# EAGLE board ups_unit (EAGLE 9.5.2)

Size 60.96 x 20.31 mm. Coordinates in mm from the lower left corner, seen from the top.
Outline: 0,0 60.96,0 60.96,20.31 0,20.31 0,0
Copper layers (1*16): Top 0.035mm / dielectric 1.5mm / Bottom 0.035mm
Design rules "default": minimum track width 6mil, minimum drill 0.35mm, track to track 6mil, track to pad 6mil, pad to pad 6mil, via to via 6mil, smd to smd 6mil, copper to edge 40mil, drill to drill 6mil, minimum pad ring 10mil, minimum via ring 8mil, stop-mask expansion 4mil, vias tented up to drill 0mil, thermal gap 10mil
Holes 3 mm at 3.81,10.16 57.15,10.16

## Footprints (pad centres in the part's own frame; a part is rotated, then mirrored left to right if it is on the bottom)
C1206 = smd 1.6 x 1.8: 1 -1.4,0; 2 1.4,0
R1206 = smd 1.6 x 1.803: 1 -1.422,0; 2 1.422,0
C0603 = smd 1.1 x 1: 1 -0.85,0; 2 0.85,0
SOT23 = smd 1 x 1.4: 1 -0.95,-1.1; 2 0.95,-1.1; 3 0,1.1
C2012 = smd 1.3 x 1.5: 1 -0.85,0; 2 0.85,0
C0805 = smd 1.3 x 1.5: 1 -0.95,0; 2 0.95,0
DO35-10 = drill 0.813 long: A 5.08,0; C -5.08,0
SMA-DO214AC = smd 1.8 x 1.7: A -2.05,0; K 2.05,0
1X02 = drill 1.016 long: 1 -1.27,0; 2 1.27,0
TACTILE_SWITCH_SMD_RIGHT_ANGLE = smd 1.1 x 2: 1 -1.95,0; 2 1.95,0 | hole 0.7: 0,0.9; 0,-0.9

## Placement (x,y rotation side)
0.1UF4  [C1206]  29.21,17.78 0 bottom
0.1UF5  [C1206]  29.21,12.7 0 bottom
1.8K1  [R1206]  16.51,6.35 0 bottom
1M1  [R1206]  16.51,10.16 0 bottom
1UF1  [C0603]  10.16,10.16 0 bottom
1UF2  [C0603]  10.16,6.35 0 bottom
2N7002K1  BCX70SMD  [SOT23]  55.88,20.32 0 bottom
2N7002K2  BCX70SMD  [SOT23]  55.88,12.7 0 bottom
3.3K1  [R1206]  16.51,2.54 0 bottom
4.7UF2  [C2012]  10.16,13.97 0 bottom
5.6K1  [R1206]  10.16,17.78 0 bottom
5.6K2  [R1206]  77.47,27.94 0 bottom  (outside the outline)
10K3  [R1206]  29.21,7.62 0 bottom
10K4  [R1206]  29.21,2.54 0 bottom
10K5  [R1206]  22.86,17.78 0 bottom
10K6  [R1206]  22.86,13.97 0 bottom
22UF1  [C0805]  10.16,2.54 0 bottom
100K1  [R1206]  22.86,10.16 0 bottom
100K2  [R1206]  22.86,6.35 0 bottom
100K3  [R1206]  22.86,2.54 0 bottom
100K4  [R1206]  16.51,17.78 0 bottom
100K5  [R1206]  16.51,13.97 0 bottom
D1  1N4148DO35-10  [DO35-10]  43.18,35.56 0 bottom  (outside the outline)
D2  1N4148DO35-10  [DO35-10]  43.18,29.21 0 bottom  (outside the outline)
D3  1N4148DO35-10  [DO35-10]  43.18,22.86 0 bottom
D4  1N4148DO35-10  [DO35-10]  43.18,16.51 0 bottom
D5  1N4148DO35-10  [DO35-10]  43.18,10.16 0 bottom
D6  1N4148DO35-10  [DO35-10]  43.18,3.81 0 bottom
D9  GF1  [SMA-DO214AC]  67.31,8.89 90 bottom  (outside the outline)
DMG3415U1  MMBTA56-SOT23  [SOT23]  55.88,27.94 0 bottom  (outside the outline)
DMG3415U2  MMBTA56-SOT23  [SOT23]  55.88,35.56 0 bottom  (outside the outline)
JP1  [1X02]  57.15,5.08 270 top
JP2  [1X02]  57.15,15.24 270 top
JP3  [1X02]  3.81,15.24 90 top
JP4  [1X02]  3.81,5.08 90 top
S1  MOMENTARY-SWITCH-SPST-SMD-RIGHT-ANGLE  [TACTILE_SWITCH_SMD_RIGHT_ANGLE]  71.12,30.48 0 bottom  (outside the outline)

## Library data of the parts
0.1UF4 0.1UF5 1UF1 1UF2 4.7UF2 22UF1 = eagle-ltspice; SPICEMODEL: NONE; SPICEPREFIX: C
1.8K1 1M1 3.3K1 5.6K1 5.6K2 10K3-10K6 100K1-100K5 = eagle-ltspice; SPICEMODEL: NONE; SPICEPREFIX: R
2N7002K1 2N7002K2 = transistor-npn
D1-D6 D9 = diode
DMG3415U1 DMG3415U2 = transistor-pnp
JP1-JP4 = pinhead
S1 = SparkFun-Switches; PROD_ID: COMP-12265

## Nets
ACC: 0.1UF5.2 5.6K2.1 D2.C JP4.2
BATT: D9.A JP3.2
DCDC: 1M1.2 4.7UF2.1 10K5.2 D3.C DMG3415U1.2 DMG3415U2.3 JP2.1
GND: 0.1UF4.2 1.8K1.1 1UF2.2 2N7002K1.2 2N7002K2.2 3.3K1.1 10K5.1 22UF1.2 100K5.2 JP1.2 JP2.2 JP3.1 JP4.1 S1.1
GPIO: 1.8K1.2 5.6K1.1 D2.A D6.A JP1.1
N$103: 10K3.2 100K1.2 D9.K DMG3415U2.2
N$104: 1UF1.1 10K3.1 D5.C D6.C S1.2
N$105: 1UF1.2 10K4.2 100K1.1 DMG3415U2.1
N$106: 1UF2.1 2N7002K1.3 10K4.1
N$107: 2N7002K1.1 D1.C D4.C
N$108: 0.1UF4.1 100K2.1 D4.A
N$110: 4.7UF2.2 100K2.2 100K3.1
N$111: 5.6K1.2 100K4.2 DMG3415U1.3
N$113: 100K3.2 100K4.1 D5.A
N$115: 0.1UF5.1 100K5.1 D1.A
N$116: 1M1.1 D3.A DMG3415U1.1
N$117: 2N7002K2.3 10K6.1 22UF1.1
N$118: 2N7002K2.1 3.3K1.2 5.6K2.2

## Tracks (layer width: path | path; a pad name or v marks a point on that pad's centre or on a via)
ACC  (3 unrouted)
BATT  (1 unrouted)
DCDC  (6 unrouted)
GND  (13 unrouted)
GPIO  (4 unrouted)
N$103  (3 unrouted)
N$104  (4 unrouted)
N$105  (3 unrouted)
N$106  (2 unrouted)
N$107  (2 unrouted)
N$108  (2 unrouted)
N$110  (2 unrouted)
N$111  (2 unrouted)
N$113  (2 unrouted)
N$115  (2 unrouted)
N$116  (2 unrouted)
N$117  (2 unrouted)
N$118  (2 unrouted)